# Altium PCB WOLFMANBACKUP2.PcbDoc (part 2 of 2)
Units mm, origin at the board's own origin, x right, y up, seen from the top; angles counter-clockwise.
Board outline 40.9 x 21.1 mm, 4 copper layers (Top Layer, Signal Layer 1, Signal Layer 2, Bottom Layer), stack 0.778 mm thick; 122 components, 134 nets, 498 pads, 111 vias.
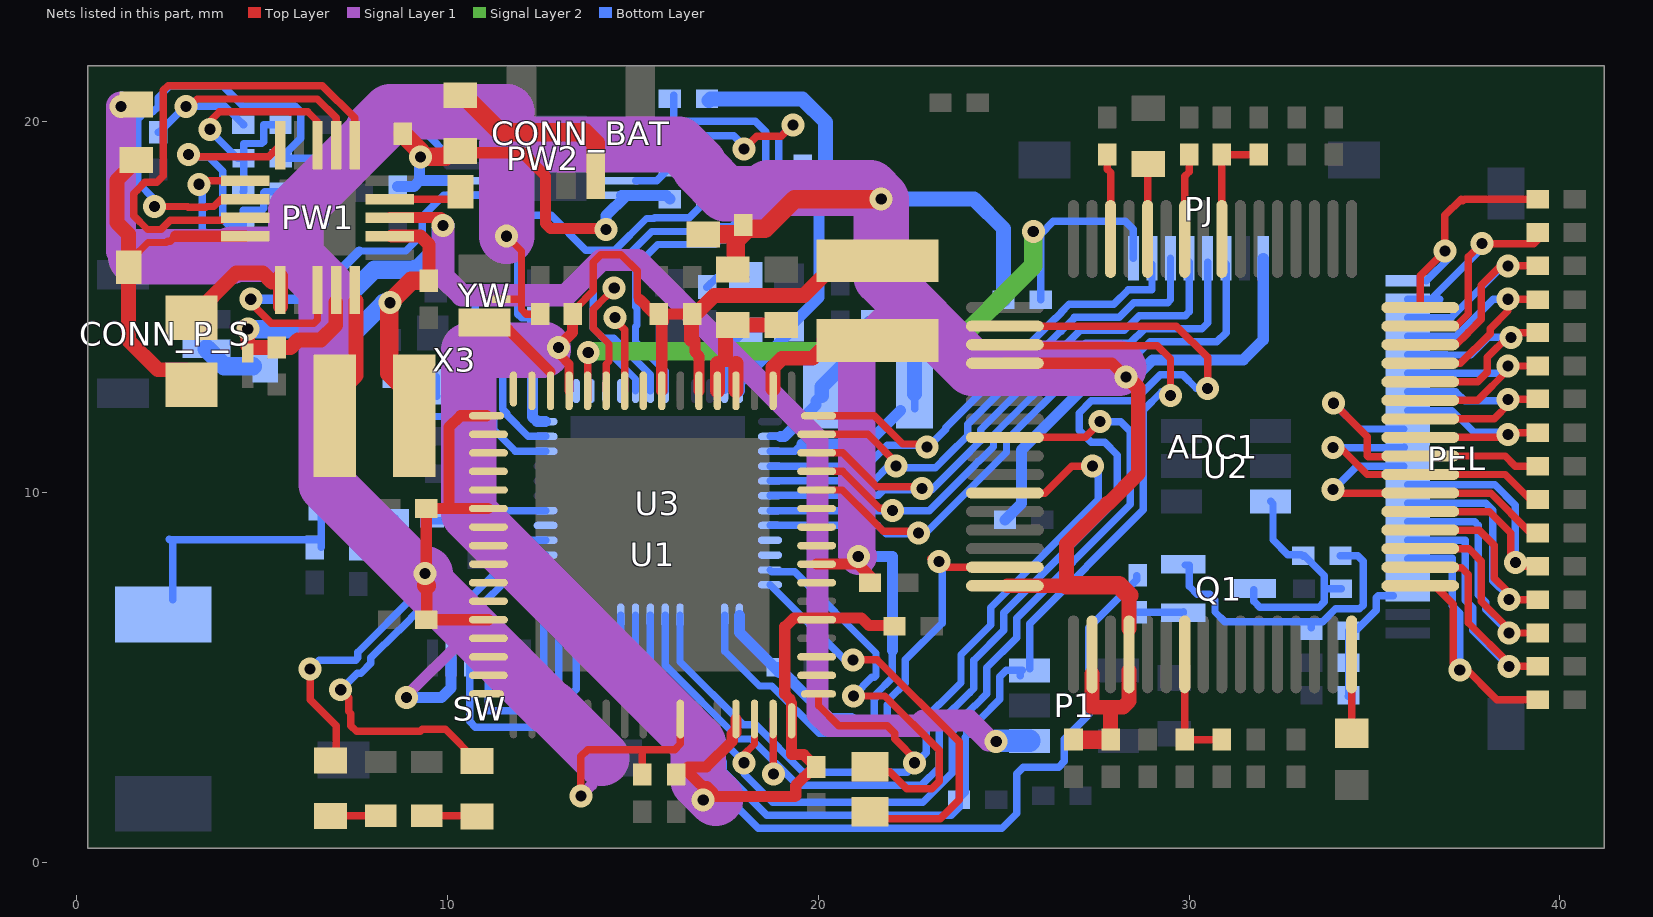
[diagram p4: the nets of this part, all layers, seen from the top]

## Via types
v1: diameter 0.62, hole 0.3, Top Layer to Bottom Layer, 80 vias
v2: diameter 0.66, hole 0.33, Top Layer to Bottom Layer, 16 vias
v3: diameter 0.62, hole 0.3, Top Layer to Bottom Layer, tented both sides, 14 vias
v4: diameter 0.62, hole 0.3, Top Layer to Bottom Layer, tented bottom, 1 vias

## Nets (pads, with @x,y where several pads share a name; then routed paths per layer and width w, separated by ;. In a path a pad name is that pad's centre, name@x,y a point inside that pad or via, vN(x,y) a via of type N, cw(c..) or ccw(c..) an arc to the next point about the centre after c; other vN are vias at no path point) (continued)
DVDD: ADC1.36 ADC1.48 ADC1.50 ADC1.52 C2.2 C10.2 C24.2 C25.2 C26.2 C27.2 C28.2 C39.1 C42.1 C47.1 CC6.2 CC7.2 PJ.1 R11.1 R12.1 R36.2 R37.2 RVDVDD.2 RVREG.2 SW.2 U1.1 U1.6 U1.12 U1.26 U1.40 U3.13 U3.36 U3.48 YW.4 | length 162
  Top Layer w0.2: YW.4@11.45,15.2 12,15.2 ; v3(11.6,16.9) 12,16.5 12,15.2 ; C10.2@12.5,14.8 12.124,14.8 12,14.924 12,15.2 ; v1(13.6,1.81) 13.6,2.874 13.783,3.057 16.132,3.057 16.283,3.208 U1.26@16.283,3.882 ; 15.2,3.04 15.25,2.99 C28.2@15.25,2.383
  Top Layer w0.3: v1(9.4,7.8) 9.4,7.52 9.446,7.474 C26.2@9.446,6.6 ; 9.432,7.488 C25.2@9.432,9.557 ; C26.2@9.435,6.567 9.445,6.557 U1.12@11.108,6.557 ; C25.2@9.435,9.557 10.05,9.557 ; U1.1@11.058,12.057 10.353,12.057 10.05,11.754 10.05,9.557 ; U1.6@11.1,9.557 10.05,9.557 ; U1.40@19.958,8.057 21.075,8.057 C27.2@21.5,7.632 ; ADC1.36@25.034,13.474 27.926,13.474 v1(28.3,13.1)
  Top Layer w0.4: ADC1.48@25.103,7.474 26.583,7.474 ; 26.7,7.488 26.7,8.6 27.79,9.69 27.818,9.69 28.629,10.5 28.629,12.805 28.334,13.1 v1(28.3,13.1) ; ADC1.50@27.384,5.1 27.384,4.2 28.218,4.2 28.384,4.366 ADC1.52@28.384,5.185 ; CC6.2@27.884,3.326 27.884,4.194 ; ADC1.52@28.384,6.316 28.384,7.216
  Top Layer w0.5: 9.435,7.485 9.446,7.474 ; C2.2@16.9,16.95 17.791,16.95 C24.2@17.8,16.959 ; RVREG.2@17.783,15.966 17.783,16.79 18.093,17.1 18.566,17.1 19.366,17.9 v1(21.7,17.9) ; 26.7,7.488 28.112,7.488 28.384,7.216 ; CC7.2@26.884,3.326 CC6.2@27.884,3.326
  Signal Layer 1 w0.3: v1(8.9,4.46) 8.9,4.51 10.39,6 ; v1(13.6,1.81) 13.9,2.11 13.9,2.3
  Signal Layer 1 w0.8: 1.2,16.49 v3(1.2,20.4)
  Signal Layer 1 w1: v3(21.082,8.262) 21.04,8.304 21.04,13.74 22.1,14.8
  Signal Layer 1 w1.5: 1.6,16.342 4.131,16.342 4.199,16.41 5.847,16.41 5.915,16.342 ; 8,19.8 8.459,20.259 11.6,20.259 ; 8.515,20.2 5.915,17.6 5.915,16.342 ; v1@9.4,7.551 v1(9.4,7.8) 9.4,7.546 12.761,4.185 12.801,4.185 14.167,2.819 ; v1@9.446,7.505 6.74,10.211 6.74,15.517 5.915,16.342 ; v3(11.6,16.9) 11.6,19.373 16.241,19.373 16.79,18.824 16.79,18.754 17.499,18.045 18.501,18.045 18.656,18.2 21.4,18.2 v1(21.7,17.9) ; v1@21.7,17.733 21.7,15.8 24.156,13.344 28.101,13.344
  Bottom Layer w0.2: v3(11.6,16.9) 11.9,16.6 11.9,14.8 12,14.7 C42.1@12.2,14.7 ; 20.9,3.842 21.457,3.842 21.514,3.899 21.514,4.406 21.56,4.452 21.56,4.555 22,4.995 22,5.73
  Bottom Layer w0.3: v1(8.9,4.46) 9.842,4.46 10.1,4.718 SW.2@10.1,5.529 ; C42.1@12.4,14.7 12.425,14.675 12.425,14.664 12.3,14.539 12.3,12.025 12.425,11.9 U3.36@12.65,11.9 ; R11.1@17,20.56 R11.1@17.06,20.56 ; U3.13@17.875,6.675 17.875,6.212 C47.1@18.944,5.143 ; U3.48@17.875,12.725 17.875,12.95 C39.1@19.3,14.375 ; C47.1@18.9,5.272 18.9,5.26 18.944,5.26 19.3,4.904 19.3,4.898 20.306,3.892 20.897,3.892 ; C39.1@19.215,14.432 20.025,15.242 20.025,17.704 20.2,17.879 ; R12.1@19.581,17.7 19.565,17.7 R12.1@19.607,17.742 ; R12.1@19.581,17.8 20.021,17.8 20.1,17.879 ; R12.1@19.587,17.7 R12.1@19.605,17.719 ; 20.2,17.934 20.234,17.9 ; v3@21.082,8.313 21.133,8.262 22,8.262 22,5.73 ; R37.2@25.04,9.25 25.478,9.689 25.478,11.138 26.637,12.298 26.64,12.298 27.436,13.094 v1@28.261,13.094 ; v1(28.3,13.1) 28.555,13.1 29.015,13.56 31.46,13.56 32,14.1 PJ.1@32,16.3
  Bottom Layer w0.4: R11.1@17.06,20.56 17.1,20.6 19.573,20.6 20.2,19.973 20.2,17.934 ; 20.234,17.9 v1(21.7,17.9) ; v1@21.691,17.902 24.2,17.902 25,17.102 R36.2@25,15.184
DVDD_OUT: CC1.2 L1.2 PW1.14 RVDVDD.1 | length 10.4
  Top Layer w0.2: CC1.2@1.5,16.3 1.93,16.73 2.427,16.73 2.456,16.76 2.534,16.76 2.674,16.9
  Top Layer w0.3: 2.674,16.9 PW1.14@4.55,16.9
  Top Layer w0.4: RVDVDD.1@1.642,18.961 1.09,18.409 1.09,17.269 1.4,16.959 1.4,14.099 2.199,13.3 L1.2@2.942,13.3
EL1: ADC1.16 PEL.20 R1.2 | length 6.9
  Top Layer w0.2: ADC1.16@36.663,14.974 ADC1.16@36.234,14.974 36.234,15.829 v1@36.9,16.495 ; ADC1.16@36.7,14.924 ADC1.16@36.947,14.924 ; v1(36.9,16.5) 36.9,17.465 37.335,17.9 ; 37.385,17.85 37.435,17.9 R1.2@39.3,17.9
  Bottom Layer w0.2: PEL.20@36.4,15.693 36.4,15.7 v1@37.05,16.35
EL2: ADC1.14 PEL.18 R4.2 | length 8.2
  Top Layer w0.2: ADC1.14@36.234,13.974 37.2,13.974 37.513,14.287 ; 37.534,14.308 37.534,14.313 37.884,14.663 37.884,15.576 38.408,16.1 v1(38.6,16.1) R4.2@39.4,16.1 39.6,16.1 R4.2@39.5,16.2
  Bottom Layer w0.2: PEL.18@35.9,14.7 37.065,14.7 38.465,16.1 v1(38.6,16.1)
EL3: ADC1.12 PEL.16 R7.2 | length 7.1
  Top Layer w0.2: ADC1.12@36.234,12.974 37.787,12.974 38.04,13.227 38.04,13.632 38.6,14.192 38.622,14.17 v1(38.678,14.17) ; v1@38.7,14.3 R7.2@39.6,14.3
  Bottom Layer w0.2: PEL.16@35.9,13.7 36.948,13.7 36.951,13.697 37.597,13.697 38.075,14.175 v1@38.678,14.175
EL4: ADC1.10 PEL.14 R10.2 | length 6.6
  Top Layer w0.2: ADC1.10@36.234,11.974 38.225,11.974 38.626,12.375 38.626,12.5 39.577,12.5 R10.2@39.588,12.512 ; R10.2@39.5,12.6 R10.2@39.588,12.512 ; R10.2@39.6,12.5 R10.2@39.588,12.512 ; R10.2@39.6,12.523 R10.2@39.588,12.512
  Bottom Layer w0.2: PEL.14@35.9,12.7 37.143,12.7 37.196,12.7 37.432,12.464 v1@38.626,12.464
  other v1: 38.6,12.5
EL5: ADC1.8 PEL.12 R21.2 | length 8.2
  Top Layer w0.2: v1(33.9,12.396) 34.809,11.487 34.809,10.974 34.829,10.954 ADC1.8@35.5,10.954 ; ADC1.8@36.234,10.974 38.526,10.974 38.8,10.7 R21.2@39.6,10.7
  Bottom Layer w0.2: v1(33.9,12.396) 34.596,11.7 PEL.12@35.792,11.7
EL6: ADC1.6 PEL.10 R25.2 | length 7.4
  Top Layer w0.2: v1(33.884,10.065) 33.975,9.974 ADC1.6@35.3,9.974 ; ADC1.6@36.234,9.974 38.131,9.974 39.205,8.9 R25.2@39.6,8.9
  Bottom Layer w0.2: v1(33.884,10.065) 34.519,10.7 PEL.10@35.792,10.7
EL7: ADC1.4 PEL.8 R28.2 | length 9.6
  Top Layer w0.2: ADC1.4@36.234,8.974 37.827,8.974 38.234,8.567 38.234,7.674 38.6,7.308 v1@38.6,7.1 ; v1(38.626,7.1) R28.2@39.4,7.1 R28.2@39.6,7.1
  Bottom Layer w0.2: PEL.8@35.9,9.7 38,9.7 38.193,9.507 38.193,7.612 v1@38.605,7.2
EL8: ADC1.2 PEL.6 R31.2 | length 10.5
  Top Layer w0.2: ADC1.2@36.425,7.965 37.335,7.965 37.534,7.766 37.534,6.471 38.634,5.371 38.634,5.3 R31.2@39.588,5.3
  Bottom Layer w0.2: PEL.6@35.9,8.7 37.45,8.7 37.45,7.533 37.45,7.081 37.65,6.881 37.65,6.272 38.066,5.856 38.066,5.851 38.6,5.317 v1@38.6,5.272
  other v1: 38.626,5.3
ELM1: ADC1.15 PEL.19 R2.2 | length 8.3
  Top Layer w0.2: ADC1.15@36.234,14.474 37.2,14.474 37.534,14.808 37.534,16.35 v1@37.884,16.7 ; v1(37.9,16.7) 39.3,16.7 R2.2@39.6,17
  Bottom Layer w0.2: PEL.19@35.9,15.2 36.524,15.2 ; 36.767,15.2 36.524,15.2 ; v1@38,16.676 36.524,15.2
ELM2: ADC1.13 PEL.17 R5.2 | length 7.4
  Top Layer w0.2: ADC1.13@36.234,13.474 37.317,13.474 38.118,14.274 38.118,14.402 38.6,14.884 v1(38.6,15.2) ; v1@38.626,15.2 R5.2@39.6,15.2
  Bottom Layer w0.2: PEL.17@35.9,14.2 37.198,14.2 38.198,15.2 v1(38.6,15.2) v1@38.605,15.2
ELM3: ADC1.11 PEL.15 R8.2 | length 6.6
  Top Layer w0.2: ADC1.11@36.234,12.474 ADC1.11@36.244,12.484 ; ADC1.11@36.351,12.484 36.357,12.478 37.786,12.478 38.6,13.292 v1@38.6,13.397 ; v1(38.6,13.4) R8.2@39.4,13.4 R8.2@39.6,13.4
  Bottom Layer w0.2: PEL.15@35.9,13.2 38.4,13.2 v1(38.6,13.4) ; v1@38.55,13.4 v1(38.6,13.4) ; v1@38.7,13.4 v1(38.6,13.4)
ELM4: ADC1.9 PEL.13 R19.2 | length 6.5
  Top Layer w0.2: ADC1.9@36.234,11.474 38.543,11.474 v1@38.626,11.557 ; v1@38.626,11.6 39.6,11.6 R19.2@39.474,11.474
  Bottom Layer w0.2: PEL.13@35.9,12.2 37.09,12.2 37.682,11.608 v1@38.6,11.608
  other v1: 38.6,11.557
ELM5: ADC1.7 PEL.11 R23.2 | length 6.8
  Top Layer w0.2: v1(33.884,11.2) 34.083,11.2 34.809,10.474 ADC1.7@35.3,10.474 ; ADC1.7@36.4,10.474 38.531,10.474 39.205,9.8 R23.2@39.3,9.8
  Bottom Layer w0.2: v1(33.884,11.2) 35.792,11.2 PEL.11@35.8,11.208
ELM6: ADC1.5 PEL.9 R26.2 | length 9.1
  Top Layer w0.2: ADC1.5@36.234,9.474 38.101,9.474 38.678,8.897 v1@38.678,8 ; v1@38.8,8 R26.2@39.6,8
  Bottom Layer w0.2: PEL.9@35.9,10.2 38.25,10.2 38.8,9.65 v1(38.8,8.1)
ELM7: ADC1.3 PEL.7 R29.2 | length 10.4
  Top Layer w0.2: ADC1.3@36.234,8.474 37.549,8.474 37.884,8.139 37.884,7.066 37.9,7.05 ; 37.884,7.05 38.626,6.308 v1(38.626,6.2) R29.2@39.6,6.2
  Bottom Layer w0.2: PEL.7@35.9,9.2 37.7,9.2 37.8,9.1 37.8,7.388 37.8,7.226 38,7.026 38,6.834 v1@38.626,6.208 ; v1(38.626,6.2) 38.792,6.2 v1@38.8,6.208 ; v1@38.678,6.208 v1@38.678,6.222
ELM8: ADC1.1 PEL.5 R32.2 | length 9.9
  Top Layer w0.2: ADC1.1@36.234,7.474 36.626,7.474 37.12,6.98 37.12,5.379 v1(37.3,5.2) 37.4,5.3 38.3,4.4 R32.2@39.6,4.4
  Bottom Layer w0.2: PEL.5@35.9,8.2 35.921,8.221 37.1,8.221 37.1,7.678 37.1,6.936 37.3,6.736 37.3,5.408 v1@37.209,5.317
HYPER_0.C\K\: U1.14
HYPER_0.C\S\: U1.15
HYPER_0.CK: U1.13
HYPER_0.DQ0: U1.10
HYPER_0.DQ1: U1.9
HYPER_0.DQ2: U1.8
HYPER_0.DQ3: U1.7
HYPER_0.DQ4: U1.5
HYPER_0.DQ5: U1.4
HYPER_0.DQ6: U1.3
HYPER_0.DQ7: U1.2
HYPER_0.RWDS: U1.11
HYPER_1.C\S\: U1.16
I2C.SCL: U1.63
I2C.SDA: U1.64
I2S0_SCK: U1.43
I2S0_SDI: U1.41
I2S0_WS: U1.42
I2S1_SDI: U1.39
JTAG.T\R\S\T\: PJ.7 U1.48 U3.4 | length 16.3
  Top Layer w0.2: U1.48@20.008,12.057 21.517,12.057 22.276,11.298 22.843,11.298 v4@22.921,11.22
  Bottom Layer w0.2: U3.4@18.7,10.7 18.702,10.698 21.294,10.698 21.536,10.94 21.54,10.94 21.867,11.267 22.885,11.267 v4(22.932,11.22) 22.932,11.232 22.944,11.22 22.963,11.22 23.437,11.694 23.437,11.733 24.734,13.031 26.388,14.684 26.404,14.684 26.55,14.83 26.55,14.846 26.764,15.06 27.969,15.06 28.366,15.457 28.985,15.457 ; 29,15.457 PJ.7@29,16.15
JTAG.TCK: PJ.3 U1.44 U3.8 | length 19.9
  Top Layer w0.2: U1.44@19.958,10.057 20.647,10.057 21.44,9.264 21.44,9.26 21.76,8.94 22.66,8.94 v1(22.7,8.9)
  Bottom Layer w0.2: U3.8@18.7,9.1 21.608,9.1 21.828,8.88 v1@22.712,8.88 ; v1@22.7,8.911 22.911,8.911 25.078,11.078 25.078,11.394 26.873,13.189 26.888,13.189 27.359,13.66 28.549,13.66 28.946,14.057 30.342,14.057 30.349,14.05 30.75,14.05 31,14.3 PJ.3@31,16.15
JTAG.TDI: PJ.6 U1.47 U3.5 | length 16.8
  Top Layer w0.2: U1.47@19.958,11.557 21.343,11.557 v1@22.2,10.7
  Bottom Layer w0.2: U3.5@18.7,10.3 19.581,10.3 ; 19.461,10.3 21.494,10.3 21.894,10.7 v1(22.1,10.7) ; v1@22.182,10.706 22.228,10.66 23.032,10.66 23.164,10.66 23.492,10.988 23.492,10.99 24.028,11.526 24.028,11.829 24.879,12.681 26.533,14.334 26.549,14.334 26.9,14.685 26.9,14.701 26.909,14.71 28.114,14.71 28.511,15.107 29.423,15.107 29.5,15.184 PJ.6@29.5,16.307
JTAG.TDO: PJ.5 U1.46 U3.6 | length 18.1
  Top Layer w0.2: U1.46@19.958,11.057 20.661,11.057 21.498,10.221 21.498,10.219 21.577,10.14 22.76,10.14 v1(22.8,10.1)
  Bottom Layer w0.2: U3.6@18.7,9.9 18.71,9.91 21.618,9.91 21.768,10.06 23.059,10.06 23.842,10.843 23.842,10.845 24.378,11.381 24.378,11.685 25.024,12.331 26.583,13.889 26.598,13.889 27.069,14.36 28.259,14.36 28.656,14.757 29.893,14.757 30,14.864 30,15.05 ; 30,15.1 PJ.5@30,16.2
JTAG.TMS: PJ.4 U1.45 U3.7 | length 17.8
  Top Layer w0.2: U1.45@19.958,10.557 20.657,10.557 21.654,9.56 v1@21.832,9.56
  Bottom Layer w0.2: U3.7@18.7,9.5 v1(22,9.5) ; v1@22.216,9.5 22.994,9.5 24.192,10.698 24.192,10.7 24.318,10.826 24.331,10.826 24.728,11.223 24.728,11.539 26.728,13.539 26.743,13.539 27.214,14.01 28.404,14.01 28.801,14.407 30.349,14.407 30.5,14.558 30.5,14.904 PJ.4@30.5,16.2
LED_1: R34.2 U3.28 | length 10.8
  Top Layer w0.2: v1(6.3,5.227) 6.3,4.4 7,3.7 R34.2@7,3.011
  Top Layer w0.3: R34.2@6.8,2.811 R34.2@7,3.011
  Bottom Layer w0.2: v1(6.3,5.227) 6.543,5.47 7.527,5.47 7.59,5.533 7.59,5.677 9.153,7.24 10.716,7.24 11.3,7.824 11.3,7.99 12.01,8.7 U3.28@12.65,8.7
LED_2: R35.2 U3.27 | length 12.1
  Top Layer w0.2: v1(7.125,4.67) 7.34,4.455 7.34,4.085 7.4,4.025 7.4,3.7 7.55,3.55 9.277,3.55 9.327,3.6 9.95,3.6 R35.2@10.8,2.75
  Bottom Layer w0.2: v1(7.125,4.67) 7.575,5.12 7.672,5.12 7.94,5.388 7.94,5.532 8.688,6.279 8.702,6.279 9.313,6.89 10.861,6.89 11.65,7.679 11.65,7.845 12.105,8.3 U3.27@12.65,8.3
MISO: ADC1.43 U1.33 U3.17 | length 25.7
  Top Layer w0.2: U1.33@20.008,4.557 20.008,4.244 20.552,3.7 21.861,3.7 22.061,3.5 22.061,3.349 v1@22.66,2.75 ; ADC1.43@24.954,9.969 26.11,9.969 26.84,10.7 v1(27.4,10.7)
  Bottom Layer w0.2: U3.17@16.275,6.675 16.275,5.429 17.982,3.722 18.315,3.722 19.597,2.44 22.408,2.44 v1@22.6,2.632 ; v1@22.639,2.7 22.914,2.975 22.914,3.826 22.96,3.872 22.96,3.975 23.232,4.247 ; 23.245,4.26 23.252,4.26 23.85,4.858 23.85,5.615 24.65,6.415 24.65,6.888 27.555,9.793 27.555,10.056 27.547,10.065 27.547,10.853 27.4,10.706 v1(27.4,10.7)
  other v1: 22.6,2.7
MOSI: ADC1.34 U1.31 U3.18 | length 34.6
  Top Layer w0.2: v1@18.783,2.456 U1.31@18.783,3.882 ; ADC1.34@25.034,14.474 29.658,14.474 30.5,13.632 v1(30.5,12.792)
  Bottom Layer w0.2: U3.18@15.875,6.675 15.875,5.334 17.866,3.343 18.199,3.343 19.452,2.09 22.782,2.09 23.264,2.572 23.264,3.681 23.31,3.727 23.31,3.823 24.082,4.595 24.091,4.595 24.2,4.704 24.2,5.47 25,6.27 25,6.743 28.067,9.81 28.067,11 27.727,11.34 27.368,11.34 27.04,11.668 27.04,12.132 27.368,12.46 28.468,12.46 ; 28.417,12.457 28.52,12.457 29.223,13.16 29.832,13.16 30.2,12.792 v1(30.5,12.792)
  other v1: 18.8,2.4
NetA_1: A.1 XX1.2 XX3.1 | length 6.8
  Bottom Layer w0.2: 2.5,8.724 2.508,8.716 2.6,8.716 ; A.1@2.6,7.1 2.6,8.716 ; XX3.1@6.6,8.508 XX3.1@6.6,8.716 ; XX1.2@6.7,9.51 6.6,9.41 XX3.1@6.6,8.716 ; 2.6,8.716 XX3.1@6.6,8.716
NetC45_2: C45.2 L7.1 U3.30 | length 3.3
  Bottom Layer w0.2: L7.1@9.537,9.25 9.56,9.228 C45.2@10.8,9.228 ; C45.2@10.714,9.297 10.917,9.5 U3.30@12.65,9.5
NetCC3_2: CC3.2 PW2.5 | length 1.2
  Bottom Layer w0.2: PW2.5@15.075,18.4 15.645,18.4 CC3.2@16,18.755 ; CC3.2@16.125,18.732 16.071,18.732 CC3.2@16.125,18.786
NetCC25_2: CC25.2 PW1.4 | length 1.9
  Top Layer w0.2: PW1.4@8.45,17.9 10.1,17.9 CC25.2@10.3,18.1
NetD1_1: D1.1 R34.1 | length 1.4
  Top Layer w0.2: R34.1@6.85,1.25 6.875,1.275 D1.1@8.2,1.275
NetD2_1: D2.1 R35.1 | length 1.4
  Top Layer w0.2: D2.1@9.446,1.275 10.775,1.275 R35.1@10.8,1.3
NetL1_1: L1.1 PW1.16 | length 3.6
  Top Layer w0.4: L1.1@3.1,14.7 4.31,15.91 5.023,15.91 5.269,15.665 ; PW1.16@5.5,15 PW1.16@5.5,15.45 PW1.16@5.5,15.825
NetL2_2: L2.2 PW1.20 | length 2.9
  Top Layer w0.28: L2.2@7.2,12.782 7.239,12.821 L2.2@7.25,12.832
  Top Layer w0.4: L2.2@6.96,13.1 7.239,12.821 7.23,12.83 7.54,13.14 PW1.20@7.54,15.16
NetL5_2: L5.2 L6.1 | length 1.2
  Bottom Layer w0.2: L5.2@17,15.525 17.275,15.8 L6.1@18.05,15.8
NetL6_2: L6.2 U3.47 | length 1.9
  Bottom Layer w0.2: U3.47@17.475,12.74 17.475,13.782 L6.2@18.05,14.357
NetLW1_2: LW1.2 U1.50 | length 3.1
  Top Layer w0.2: LW1.2@21.6,13.907 LW1.2@21.6,14.087
  Top Layer w0.4: U1.50@18.783,12.782 18.783,13.367 19.023,13.607 19.844,13.607 20.037,13.8 LW1.2@20.2,13.8 ; LW1.2@20.151,14.1 LW1.2@20.9,14.1
NetPW1_6: PW1.6 PW1.13 | length 13
  Top Layer w0.2: 1.632,18.135 1.846,18.35 2.165,18.35 2.34,18.525 2.34,20.832 2.468,20.96 6.63,20.96 7.5,20.09 PW1.6@7.5,19.35 ; 1.635,18.135 1.632,18.133 1.629,18.133 1.54,18.043 1.54,17.455 1.915,17.08 2.282,17.08 2.282,17.09 2.524,17.332 3.916,17.332 PW1.13@4,17.416
NetPW1_7: PW1.7 R6.2 R27.1 | length 7.2
  Top Layer w0.2: v1@3,20.35 3.25,20.6 6.495,20.6 7,20.095 PW1.7@7,19.95
  Bottom Layer w0.2: R27.1@2.2,19.7 2.233,19.7 v1@2.881,20.348 ; v1(2.957,20.395) 2.957,20.405 4,20.405 4.355,20.05 R6.2@4.506,19.9
NetPW1_8: PW1.8 R6.1 R9.1 R20.1 | length 7.6
  Top Layer w0.2: v1(3.6,19.782) 3.6,20 3.85,20.25 5.744,20.25 5.75,20.244 5.756,20.25 6.244,20.25 6.5,19.994 6.5,19.905 PW1.8@6.495,19.9
  Bottom Layer w0.2: v1@3.455,19.845 3.5,19.8 3.542,19.8 v1@3.6,19.742 ; v1(3.6,19.782) v1@3.6,19.742 ; R9.1@4.5,18.1 4.506,18.106 R20.1@4.506,19 ; R6.1@5.506,19.9 R6.1@5.5,19.9 5.05,19.9 5.05,19.448 5.002,19.4 4.506,19.4 R20.1@4.506,19 ; v1@3.6,19.742 4.342,19 R20.1@4.506,19
NetPW1_10: PW1.10 R9.2 R24.1 | length 7.8
  Top Layer w0.2: v1(3.02,19.1) v1@2.98,19.1 ; PW1.10@5.5,19.35 5.19,19.04 3.04,19.04 v1@2.98,19.1 ; v1@2.91,19.17 2.9,19.18 2.91,19.19 v1@2.91,19.17 ; v1@2.91,19.17 v1@2.98,19.1
  Bottom Layer w0.2: v1(3.02,19.1) 3.02,19.089 2.97,19.04 3.56,19.04 3.95,18.65 3.95,18.454 3.95,17.344 4.102,17.192 R24.1@4.5,17.192 4.5,17.6 5.005,17.6 5.05,17.645 5.05,18.069 5.081,18.1 R9.2@5.48,18.1
NetPW1_11: PW1.11 R24.2 R30.1 | length 6.9
  Top Layer w0.2: v1@3.455,18.4 PW1.11@4.55,18.4
  Bottom Layer w0.2: v1@3.25,18.2 3.39,18.06 3.39,17.072 3.862,16.6 5,16.6 R24.2@5.5,17.1 ; R24.2@5.5,17.192 6.674,17.192 6.7,17.217 R30.1@6.7,18.069
  other v1: 3.3,18.3
NetPW1_12: PW1.12 R20.2 R33.1 | length 12.7
  Top Layer w0.2: v1(2.1,17.7) v1@2.16,17.64 ; 2.413,17.7 3,17.7 3.018,17.682 3.482,17.682 3.5,17.7 3.706,17.7 3.906,17.9 PW1.12@4.55,17.9
  Bottom Layer w0.2: v1(2.1,17.7) 2.1,17.897 1.65,18.346 1.65,20.054 1.846,20.25 2.055,20.25 2.2,20.395 2.2,20.64 2.515,20.955 3.945,20.955 4.5,20.4 5.904,20.4 6.05,20.254 6.05,19.544 R20.2@5.506,19 R33.1@6.7,19
NetPW2_10: PW2.10 R13.1 | length 2.9
  Bottom Layer w0.2: R13.1@7.7,19.9 9.205,19.9 9.65,19.455 9.855,19.25 9.86,19.25 9.86,19.222 9.882,19.2 PW2.10@10.281,19.2
NetQ1_1: Q1.1 R15.2 | length 1.2
  Bottom Layer w0.2: R15.2@28.62,6.758 29.823,6.758 Q1.1@29.832,6.75 ; Q1.1@29.85,6.75 Q1.1@29.85,6.774
NetQ1_2: Q1.2 R16.2 R17.1 | length 8.2
  Bottom Layer w0.2: Q1.2@29.9,8.033 30.011,8.033 30.011,7.455 30.216,7.25 30.554,7.25 30.7,7.104 30.7,6.766 30.966,6.5 R17.1@33.3,6.5 ; R17.1@33.3,6.339 R17.1@33.3,6.5 ; R16.2@34.082,8.288 34.545,8.288 34.7,8.133 34.7,6.954 34.596,6.85 33.951,6.85 33.601,6.5 R17.1@33.3,6.5
NetU1_62: U1.62 YW.3 | length 2.9
  Top Layer w0.2: YW.3@11,14.775 11.308,14.775 11.683,14.4 YW.3@11.673,14.4 ; U1.62@12.783,12.732 U1.62@12.783,13.236
  Top Layer w0.28: YW.3@11.683,14.336 U1.62@12.783,13.236
P0.00/XL1: C37.1 U3.2 X4.1 | length 4.7
  Bottom Layer w0.2: U3.2@18.988,11.5 U3.2@18.7,11.5 U3.2@19.02,11.5
  Bottom Layer w0.3: U3.2@18.988,11.5 19.091,11.5 19.945,12.354 19.945,12.457 X4.1@20.096,12.608
  Bottom Layer w0.4: X4.1@20.096,12.608 20.096,12.836 21.4,14.14 C37.1@21.4,14.558
P0.01/XL2: C41.1 U3.3 X4.2 | length 6.5
  Bottom Layer w0.2: U3.3@18.7,11.1 19.034,11.1 19.366,11.1 19.566,11.3 ; X4.2@22.6,12.244 X4.2@22.6,12.6 ; X4.2@22.6,12.648 X4.2@22.639,12.608
  Bottom Layer w0.3: 19.566,11.3 21.316,11.3 X4.2@22.216,12.2
  Bottom Layer w0.4: C41.1@22.18,14.607 22.6,14.187 X4.2@22.6,12.648
P0.07: U3.9
P0.08: U3.10
P0.09: pad.2 U3.11 | length 11.1
  Top Layer w0.2: v1(20.954,4.502) 21.798,4.502 23.26,3.04 23.26,2.2 23.06,2 22.39,2 21.931,2.459 pad.2@21.4,2.589
  Bottom Layer w0.2: U3.11@18.7,7.9 18.75,7.85 19.371,7.85 21.56,5.661 21.56,5.05 21.514,5.004 21.445,5.004 20.954,4.513 v1(20.954,4.502)
P0.10: pad.3 U3.12 | length 11.1
  Top Layer w0.2: v1(20.943,5.473) 21.593,5.473 23.8,3.266 23.8,1.7 23.29,1.19 21.51,1.19 pad.3@21.4,1.3
  Bottom Layer w0.2: U3.12@18.7,7.5 20.771,5.429 20.816,5.473 v1(20.943,5.473)
P0.11: ADC1.47 U3.14 | length 13.5
  Top Layer w0.2: v1@23.033,8.2 23.299,7.934 23.3,7.933 23.341,7.974 ADC1.47@25.034,7.974
  Bottom Layer w0.2: U3.14@17.475,6.675 17.475,5.714 18.417,4.772 18.75,4.772 20.03,3.492 21.602,3.492 21.864,3.754 21.864,4.261 21.91,4.307 21.91,4.41 22.35,4.85 22.35,5.477 23.34,6.467 23.34,8.053 v1(23.26,8.133)
P0.17: ADC1.35 P1.3 R3.1 U3.20 | length 31.8
  Top Layer w0.2: ADC1.35@25.034,13.974 25.058,13.95 29.147,13.95 29.5,13.597 v1(29.5,12.6)
  Bottom Layer w0.2: U3.20@15.075,6.675 15.075,5.1 17.44,2.735 17.44,2.468 18.618,1.29 23.59,1.29 23.8,1.5 R3.1@23.8,1.7 ; R3.1@23.8,1.74 23.964,1.904 23.964,3.391 24.01,3.437 24.01,3.533 24.372,3.895 24.381,3.895 24.9,4.414 24.9,4.67 24.9,5.023 25.068,5.191 25.443,5.191 P1.3@25.443,5.143 ; P1.3@25.443,5.044 P1.3@25.443,5.143 ; P1.3@25.5,5.2 P1.3@25.443,5.143 ; P1.3@25.7,5.232 25.7,6.453 28.767,9.52 28.767,9.799 28.767,12.209 29.258,12.7 29.358,12.6 v1(29.5,12.6)
P0.18: R15.1 U3.21 | length 22.8
  Bottom Layer w0.2: 14.676,5.1 14.725,5.1 14.725,4.955 16.898,2.781 16.898,2.423 16.952,2.37 17.022,2.37 17.56,1.832 17.56,1.807 17.86,1.507 17.86,1.462 18.382,0.94 24.956,0.94 25.35,1.334 ; 14.675,5.1 U3.21@14.675,6.675 ; 25.35,1.346 25.35,2.404 25.53,2.584 26.484,2.584 26.637,2.737 26.637,3.33 27.3,3.993 27.3,6.342 28.59,7.632 R15.1@28.59,7.745
P0.21/RESET: SW.3 U3.24 | length 7.1
  Bottom Layer w0.2: SW.3@10.6,5.529 10.6,3.816 10.757,3.659 12.451,3.659 13.475,4.683 U3.24@13.475,6.675 U3.24@13.475,6.7
P0.24: U3.29
P0.25: U3.37
P0.26: U3.38
P0.27: U3.39
P0.28/AIN4: U3.40
P0.29/AIN5: PJ.8 R36.1 U1.60 U3.41 | length 22.4
  Top Layer w0.2: U1.60@13.783,12.484 U1.60@13.783,12.732 13.783,13.744 v3(13.8,13.761)
  Signal Layer 2 w0.5: v3(13.8,13.761) 13.833,13.794 23.428,13.794 23.461,13.761 25.8,16.1 v1(25.8,17.026)
  Bottom Layer w0.2: v3(13.8,13.761) 13.833,13.794 14.331,13.794 U3.41@15.075,13.05 ; U3.41@15.075,12.725 U3.41@15.075,13.045 ; R36.1@26,15.184 26,16.956 26.344,17.3 28.284,17.3 28.5,17.084 PJ.8@28.5,16.307
P0.30/AIN6: PW2.1 R11.2 U3.42 | length 16
  Bottom Layer w0.2: PW2.1@14.7,20 15.268,20 18.305,20 18.585,19.72 18.585,18.08 17.679,17.175 17.679,17.173 17.664,17.157 17.206,17.157 17.076,17.026 15.516,17.026 14.66,16.17 13.97,16.17 13.94,16.14 13.94,14.413 14.203,14.15 14.488,14.15 15.475,13.163 U3.42@15.475,12.725 ; R11.2@16.1,20.7 16.1,20.025 16.125,20
P0.31/AIN7: PW2.2 R12.2 U3.43 | length 16.2
  Top Layer w0.2: v1(18,19.255) 18.345,19.6 19,19.6 v1@19.3,19.9
  Bottom Layer w0.2: PW2.2@14.7,19.6 14.705,19.605 17.72,19.605 18,19.325 v1(18,19.255) ; U3.43@15.875,12.725 15.875,13.22 ; 15.875,13.225 15.875,13.258 15.075,14.058 15.075,14.459 15.114,14.498 15.114,14.962 15.075,15.001 15.075,16.075 15.676,16.676 17.221,16.676 17.351,16.807 17.808,16.807 18.935,17.934 18.935,18.7 ; v1@19.3,19.9 18.944,19.544 18.935,19.544 18.935,18.7 ; R12.2@19.581,18.7 18.935,18.7
  other v1: 19.325,19.9
POR_N: U1.57
REF: PEL.4
REF1.5V: CC21.2 PEL.3 R17.2 R18.2 | length 3.3
  Bottom Layer w0.2: R18.2@34.296,4.5 34.3,4.504 R18.2@34.3,4.518 CC21.2@34.3,5.4 R17.2@34.3,6.265 ; R17.2@34.5,6.297 34.538,6.297 35.05,6.809 35.05,7.15 35.1,7.2 PEL.3@35.508,7.2
REF2V: CC19.2 Q1.3 R16.1 U2.6 | length 6.4
  Bottom Layer w0.2: Q1.3@31.75,7.369 31.75,7.055 31.907,6.898 33.504,6.898 33.65,7.044 33.65,7.369 ; U2.6@32.2,9.75 32.265,9.685 32.265,8.711 32.662,8.313 33.031,8.313 R16.1@33.082,8.262 ; R16.1@33.082,8.288 33.114,8.288 33.65,7.752 33.65,7.369 ; CC19.2@34.1,7.398 33.679,7.398 33.65,7.369
RF: L7.2 XX1.1 XX2.1 | length 1.6
  Bottom Layer w0.2: XX1.1@7.674,9.297 7.681,9.304 XX1.1@7.682,9.304 ; XX2.1@7.682,8.716 XX1.1@7.682,9.304 ; XX1.1@7.7,9.561 XX1.1@7.761,9.5 ; L7.2@8.6,9.3 XX1.1@7.682,9.304
SCK: ADC1.40 U1.30 U3.19 | length 27.6
  Top Layer w0.2: v1(18,2.7) 18,2.858 17.966,2.891 18.283,3.208 U1.30@18.283,3.73 ; ADC1.40@25.034,11.474 27.206,11.474 v1@27.632,11.9
  Bottom Layer w0.2: U3.19@15.475,6.675 15.475,5.238 v1@17.999,2.715 ; v1(18,2.7) 18,2.408 18.768,1.64 22.827,1.64 23.614,2.427 23.614,3.536 23.66,3.582 23.66,3.678 24.227,4.245 24.236,4.245 24.55,4.559 24.55,5.27 25.35,6.07 25.35,6.598 28.417,9.665 28.417,11.644 28.161,11.9 v1(27.6,11.9) v1@27.6,11.903
SP_IN: CONN_P_S.1 RVSP.1 | length 1.4
  Bottom Layer w0.5: CONN_P_S.1@3.51,13.864 3.98,13.394 RVSP.1@4.752,13.394
SP_MS: CC24.2 L2.1 PW1.2 RVSP.2 | length 9.4
  Top Layer w0.35: v3(8.45,15.106) v3@8.5,15.106 ; v3@8.464,15.07 v3@8.5,15.106 ; v3@8.5,15.168 v3@8.5,15.106 ; PW1.2@8.5,16.9 9.279,16.9 9.5,16.679 CC24.2@9.5,15.7
  Top Layer w0.5: v3@8.432,15.038 8.432,13.208 9.11,12.53 L2.1@9.11,12.083 ; v3@8.5,15.168 9.032,15.7 CC24.2@9.446,15.7
  Bottom Layer w0.2: v3@8.5,15.1 8.593,15.193 v3@8.644,15.193
  Bottom Layer w0.5: RVSP.2@6.593,13.4 8.293,15.1 v3@8.5,15.1
SPIM_SDIO2: U1.34
SPIM_SDIO3: U1.35
SWDCLK: SW.4 U3.25 | length 6.8
  Bottom Layer w0.2: SW.4@11.1,5.529 11.1,4.1 12.397,4.1 13,4.703 ; U3.25@12.4,7.5 U3.25@12.65,7.5 13,7.15 13,4.705
SWDIO: SW.5 U3.26 | length 6.2
  Bottom Layer w0.2: SW.5@11.6,5.529 11.604,5.526 11.604,4.504 12.305,4.504 12.6,4.798 12.6,7.044 12.361,7.044 12,7.405 12,7.599 12.2,7.799 12.2,7.9 U3.26@12.65,7.9
UART.RX: U1.58 | length 2.1
  Top Layer w0.2: v1@14.5,14.663 v1@14.525,14.688 ; v1(14.525,14.71) v1@14.525,14.688 ; U1.58@14.783,12.732 14.783,14.38 14.525,14.638 v1@14.525,14.688
UART.TX: U1.59 | length 3.2
  Top Layer w0.2: 13.94,14.935 13.938,14.933 13.938,14.415 14.36,13.993 14.36,13.971 ; 13.946,14.942 14.264,15.26 14.268,15.26 14.5,15.492 v1(14.5,15.5) ; U1.59@14.283,12.732 14.283,13.452 14.36,13.529 14.36,13.95
VAVD: C1.2 RVREG.1 U1.52 U1.53 | length 4.6
  Top Layer w0.2: 17.283,13.474 17.5,13.474 ; 17.5,13.597 17.5,13.474 ; RVREG.1@17.5,14.35 17.5,14.425 RVREG.1@17.557,14.482 ; 17.783,13.474 17.5,13.474
  Top Layer w0.4: U1.53@17.283,12.732 17.283,13.474 ; 17.5,13.597 17.5,14.35 RVREG.1@17.7,14.55 ; RVREG.1@17.703,14.507 C1.2@19,14.507 ; U1.52@17.783,12.732 17.783,13.474
VBAT: 0.01.2 PW1.18 PW2.7 | length 17.8
  Top Layer w0.2: v3(4.7,15.2) 4.7,15.115 4.704,15.111 4.7,15.106 5.253,14.553 ; 5.256,14.55 6.405,14.55 6.5,14.645 PW1.18@6.5,15.176 ; PW1.18@6.5,15.395 PW1.18@6.5,15.45
  Bottom Layer w0.2: v3(4.7,15.2) 4.7,15.3 v3@4.8,15.2 ; 7.625,16.5 8.874,16.5 9.327,16.953 9.327,17.422 PW2.7@9.906,18 ; PW2.7@9.9,18 PW2.7@9.906,18 ; 0.01.2@17.005,17.879 16.519,17.393 15.596,17.393 15.58,17.376 15.371,17.376 14.515,16.52 13.737,16.52 12.797,17.46 11.47,17.46 11.33,17.6 10.93,18 PW2.7@10.45,18 PW2.7@9.906,18
  Bottom Layer w0.25: v3@4.8,15.2 6.325,15.2 7.625,16.5
VBAT_CONN: CONN_BAT.1 RVBAT.1 | length 5.1
  Top Layer w0.5: RVBAT.1@10.353,20.7 10.434,20.7 11.434,19.7 13.7,19.7 14,19.4 CONN_BAT.1@14,18.55 CONN_BAT.1@14,18.516
VBAT_IN: 0.01.1 CC2.2 CC4.2 PW2.6 PW2.8 RVBAT.2 | length 12.2
  Top Layer w0.2: RVBAT.2@10.206,19.049 10.243,19.049 10.248,19.054 RVBAT.2@10.351,18.95
  Top Layer w0.3: RVBAT.2@10.5,19.2 10.55,19.15 12.024,19.15 12.65,18.524 12.65,17.243 12.783,17.11 v1@14.268,17.11 ; v1@14.27,17.11 v1@14.3,17.08
  Top Layer w0.5: CC2.2@8.8,19.66 9.3,19.16 9.274,19.133 v3(9.274,19.04) 9.947,19.04 RVBAT.2@10.057,19.149
  Bottom Layer w0.3: CC4.2@8.664,18.242 9.095,18.242 9.253,18.4 ; v3@9.253,19.049 9.253,18.464 9.317,18.4 PW2.8@10.45,18.4 ; v1(14.283,17.08) 14.283,17.453 PW2.6@14.8,17.97 ; PW2.6@14.7,18 15.902,18 0.01.1@16,17.902
VCAP1: ADC1.28 CC13.2 | length 2.2
  Top Layer w0.2: CC13.2@28.882,19.066 28.884,19.064 ADC1.28@28.884,16.824
VCAP2: ADC1.30 CC5.2 | length 1.5
  Top Layer w0.2: CC5.2@27.79,19.1 27.79,18.71 27.884,18.616 ADC1.30@27.884,17.6
VCAP3: ADC1.55 CC14.2 CC15.2 | length 3.3
  Top Layer w0.2: CC14.2@29.85,3.334 29.858,3.326 CC14.2@29.884,3.326 CC15.2@30.884,3.326 ; CC14.2@29.884,3.342 ADC1.55@29.884,5.624
VCAP4: ADC1.26 CC10.2 | length 1.5
  Top Layer w0.2: ADC1.26@29.884,17.316 ADC1.26@29.9,17.3 ; ADC1.26@29.884,17.65 29.884,18.516 30,18.632 CC10.2@30,19.1
VCLU: C29.2 C30.2 C31.2 C32.2 CW1.2 CW2.2 LW1.1 U1.29 U1.32 U1.37 U1.54 U1.56 U1.61 | length 48.6
  Top Layer w0.2: v3@13.042,13.727 v3@13.042,13.857 ; C29.2@13.457,14.948 13.94,15.43 13.94,16.198 14.142,16.4 14.683,16.4 15.117,15.966 15.117,15.259 15.189,15.187
  Top Layer w0.25: v3@13.042,13.727 13.042,13.692 13.283,13.451 U1.61@13.283,12.732
  Top Layer w0.3: v3@12.963,13.857 v3@13.042,13.857 ; v3@12.969,13.9 13.375,14.305 C29.2@13.375,14.884 ; C29.2@13.4,14.825 13.457,14.825 C29.2@13.457,14.948 ; 15.189,15.187 15.519,14.857 CW2.2@15.66,14.857 ; CW2.2@15.66,14.819 15.679,14.8 CW2.2@15.7,14.8 CW1.2@16.37,14.8 ; U1.56@15.783,12.732 CW2.2@15.783,14.617 ; 16.493,2.456 v1@17.159,1.79 ; 16.493,2.589 16.981,2.589 17.683,3.291 17.683,3.479 17.714,3.51 17.783,3.51 U1.29@17.783,3.882 ; 16.674,14.087 16.674,13.782 16.783,13.674 U1.54@16.783,12.732 ; v1(16.9,1.7) 16.9,1.956 17,2.057 17.159,1.897 v1@17.159,1.79 ; 19.233,4.423 19.1,4.556 19.1,6.379 19.12,6.379 19.347,6.606 21.168,6.606 21.374,6.4 C30.2@21.8,6.4 ; 19.283,4.317 U1.32@19.283,3.832 19.283,2.924 19.609,2.924 C31.2@19.945,2.59 ; C31.2@19.9,2.589 19.395,2.083 19.395,1.81 19.375,1.79 v1@17.159,1.79 ; LW1.1@21.1,16.1 LW1.1@21.1,16.237
  Top Layer w0.4: CW2.2@15.7,14.7 CW2.2@15.783,14.617 ; 16.585,14.107 CW1.2@16.585,14.819 ; CW1.2@16.674,14.776 17.198,15.3 19.615,15.3 20.552,16.237 21.1,16.237 LW1.1@21.6,16.237
  Signal Layer 1 w0.2: v3@12.9,13.8 v3(13,13.9)
  Signal Layer 1 w1.5: 12.59,13.851 12.565,13.825 10.575,13.825 10.575,9.425 16.771,3.229 16.771,2.218 17.239,1.749
VREFP: ADC1.24 CC11.2 CC12.2 | length 2.9
  Top Layer w0.2: CC12.2@30.884,19.054 30.884,17.216 ADC1.24@30.9,17.2 ; CC12.2@30.9,19.054 30.946,19.1 CC11.2@31.884,19.1
VSTOR: CC22.2 CC23.2 P1.1 PW1.3 PW1.19 | length 39.1
  Top Layer w0.3: PW1.3@8.45,17.4 9.826,17.4 v3@9.876,17.35
  Top Layer w0.4: v3(4.62,14.395) 4.62,13.93 4.65,13.9 CC22.2@5.4,13.9 5.773,13.9 5.973,14.1 6.591,14.1 6.99,14.499 PW1.19@6.99,15.117
  Signal Layer 1 w0.6: v3(9.887,17.19) 9.887,15.813 10.39,15.31 13.198,15.31 14.148,16.26 15.135,16.26 19.981,11.414 19.981,4.019 20.3,3.7 22.7,3.7 22.842,3.842 24.058,3.842 v1@24.6,3.3
  Bottom Layer w0.5: v3@4.704,14.386 6.422,14.386 8.036,16 9.081,16 9.089,16.007 9.223,16.007 ; 9.261,16.007 9.261,16.073 9.827,16.639 v3@9.827,17.083
  Bottom Layer w0.6: v1@24.8,3.3 24.809,3.291 P1.1@25.7,3.291
  other v1: 24.8,3.27
WCT: ADC1.64 CC16.2 | length 1.7
  Top Layer w0.2: CC16.2@34.384,3.5 34.384,5.184 ADC1.64@34.4,5.2
XC1: C40.1 U3.34 X3.1 | length 6.1
  Bottom Layer w0.2: C40.1@8.5,13.1 9.253,13.1 X3.1@9.5,12.853 ; X3.1@9.475,12.8 9.501,12.774 9.501,12.039 11.193,12.039 11.25,11.982 11.25,11.687 11.837,11.1 U3.34@12.65,11.1 ; X3.1@9.707,13.107 9.707,12.588 X3.1@9.714,12.581
XC2: C34.1 U3.35 X3.3 | length 5.6
  Bottom Layer w0.2: X3.3@10.6,14.314 X3.3@10.614,14.3 ; C34.1@10.7,15.3 10.757,15.243 X3.3@10.757,14.303 ; X3.3@10.714,14.236 X3.3@10.9,14.05 ; X3.3@10.757,14.29 X3.3@10.757,14.303 ; 11.397,14.303 X3.3@10.757,14.303 ; 11.4,14.315 11.5,14.215 11.5,12.596 11.498,12.594 11.498,12.229 11.6,12.127 11.6,12.084 12.184,11.5 U3.35@12.65,11.5
pads on no net: A.2 ADC1.17 ADC1.18 ADC1.27 ADC1.29 ADC1.37 ADC1.42 ADC1.44 ADC1.45 ADC1.46 ADC1.60 ADC1.61 ADC1.62 ADC1.63 CONN_BAT.0 CONN_P_S.0 P1.4 PEL.0 PJ.0 PW2.4 PW2.9 PW2.11 PW2.12 SW.0 U1.51 U1.55 U2.3 U2.5 U3.44 YW.1

## Polygon pours and split planes (outlines as drawn)
DGND on Bottom Layer "Bottom Layer-No Net" (solid, pour order 14): 0.6,21.5 0.6,12.2 5.891,12.2 5.9,0.4 24.956,0.4 24.956,4.7 26.3,4.7 26.3,6.6 29,9.3 29,12.2 30.393,12.2 32.6,14.407 32.6,17.955 25.068,17.955 25,17.955 25,21.5
AGND on Bottom Layer "Bottom Layer-No Net" (solid, pour order 16): 30.4,12.1 31.7,13.4 32.63,14.33 32.7,14.4 32.7,18.055 25.085,18.055 25.1,18.078 25.1,21.5 41.2,21.5 41.2,0.4 25.046,0.4 25.046,4.597 26.41,4.597 26.41,6.598 29.002,9.2 29.1,9.299 29.1,12.074 29.1,12.1
AGND on Signal Layer 2 "Bottom Layer-No Net" (solid, pour order 18): 30.372,12.2 31.672,13.5 32.602,14.43 32.672,14.5 32.672,18.155 25.057,18.155 25.072,18.178 25.072,21.6 41.172,21.6 41.172,0.5 25.019,0.5 25.019,4.697 26.382,4.697 26.382,6.698 28.974,9.3 29.072,9.399 29.072,12.174 29.072,12.2
DGND on Signal Layer 2 "Bottom Layer-No Net" (solid, pour order 20): 0.572,21.6 0.572,12.3 5.864,12.3 5.872,0.5 24.928,0.5 24.928,4.8 26.272,4.8 26.272,6.7 28.972,9.4 28.972,12.3 30.365,12.3 32.572,14.507 32.572,18.055 25.04,18.055 24.972,18.055 24.972,21.6
DGND on Signal Layer 1 "Bottom Layer-No Net" (solid, pour order 26): 31.48,14.861 31.48,13.547 30.266,12.332 28.952,12.332 28.919,12.3 28.919,9.4 28.635,9.116 28.635,4.8 28.216,4.026 28.216,0.5 5.819,0.5 5.811,12.3 0.519,12.3 0.519,21.6 24.919,21.6 24.919,18.055 26.482,18.055 26.482,14.861
AGND on Signal Layer 1 "Bottom Layer-No Net" (solid, pour order 28): 30.319,12.2 31.619,13.5 31.619,15.017 26.603,15.017 26.603,18.155 25.004,18.155 25.019,18.178 25.019,21.6 41.119,21.6 41.119,0.5 28.51,0.5 28.51,4.035 28.921,4.798 28.921,7.155 28.921,9.3 29.019,9.399 29.019,12.174 29.019,12.2
AGND on Top Layer "Bottom Layer-No Net" (solid, pour order 30): 30.319,12.2 31.619,13.5 31.619,15.017 26.603,15.017 26.603,18.155 25.004,18.155 25.019,18.178 25.019,21.6 41.119,21.6 41.119,0.5 28.51,0.5 28.51,4.035 28.921,4.798 28.921,7.155 28.921,9.3 29.019,9.399 29.019,12.174 29.019,12.2
DGND on Top Layer "Bottom Layer-No Net" (solid, pour order 32): 31.48,14.861 31.48,13.547 30.266,12.332 28.952,12.332 28.919,12.3 28.919,9.4 28.635,9.116 28.635,4.8 28.216,4.026 28.216,0.5 5.819,0.5 5.811,12.3 0.519,12.3 0.519,21.6 24.919,21.6 24.919,18.055 26.482,18.055 26.482,14.861

## Other copper
Top Layer:
  rectangle net AGND: 24.028,18.5 26.328,20.9
  rectangle net VCLU: 15.4,13.529 16.9,15.241

## Silkscreen, mask and mechanical layers (free items; w line width, h text height)
Mechanical 1:
  the board outline again, w0.7

## Dimensions
41.2,21.495 to 41.4,0.413 on Mechanical 7
0.3,21.495 to 41.2,21.495 on Mechanical 7